# Altium PCB GFX_PCB.PcbDoc
Units mm, origin at the board's own origin, x right, y up, seen from the top; angles counter-clockwise.
Board outline 95.8 x 55.9 mm, 4 copper layers (Top Layer, GND, PWR, Bottom Layer), stack 1.526 mm thick; 52 components, 27 nets, 299 pads, 13 vias.
Unrouted connection lines stored in the file: 95.
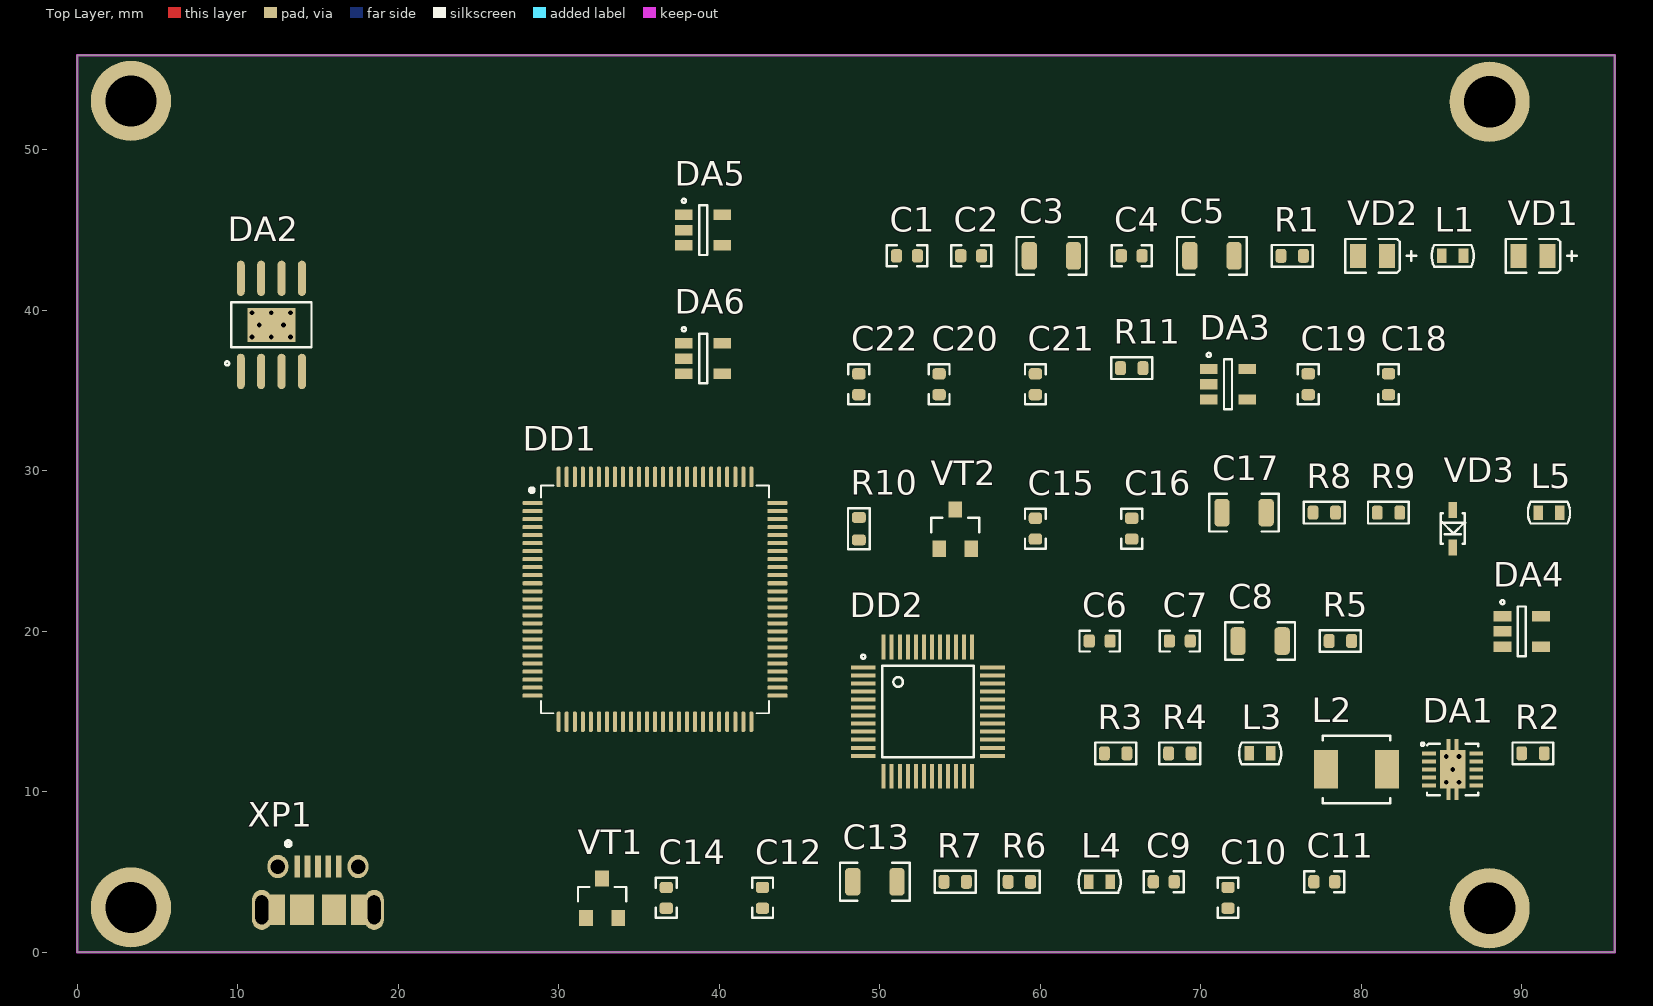
[diagram p0: Top Layer view]
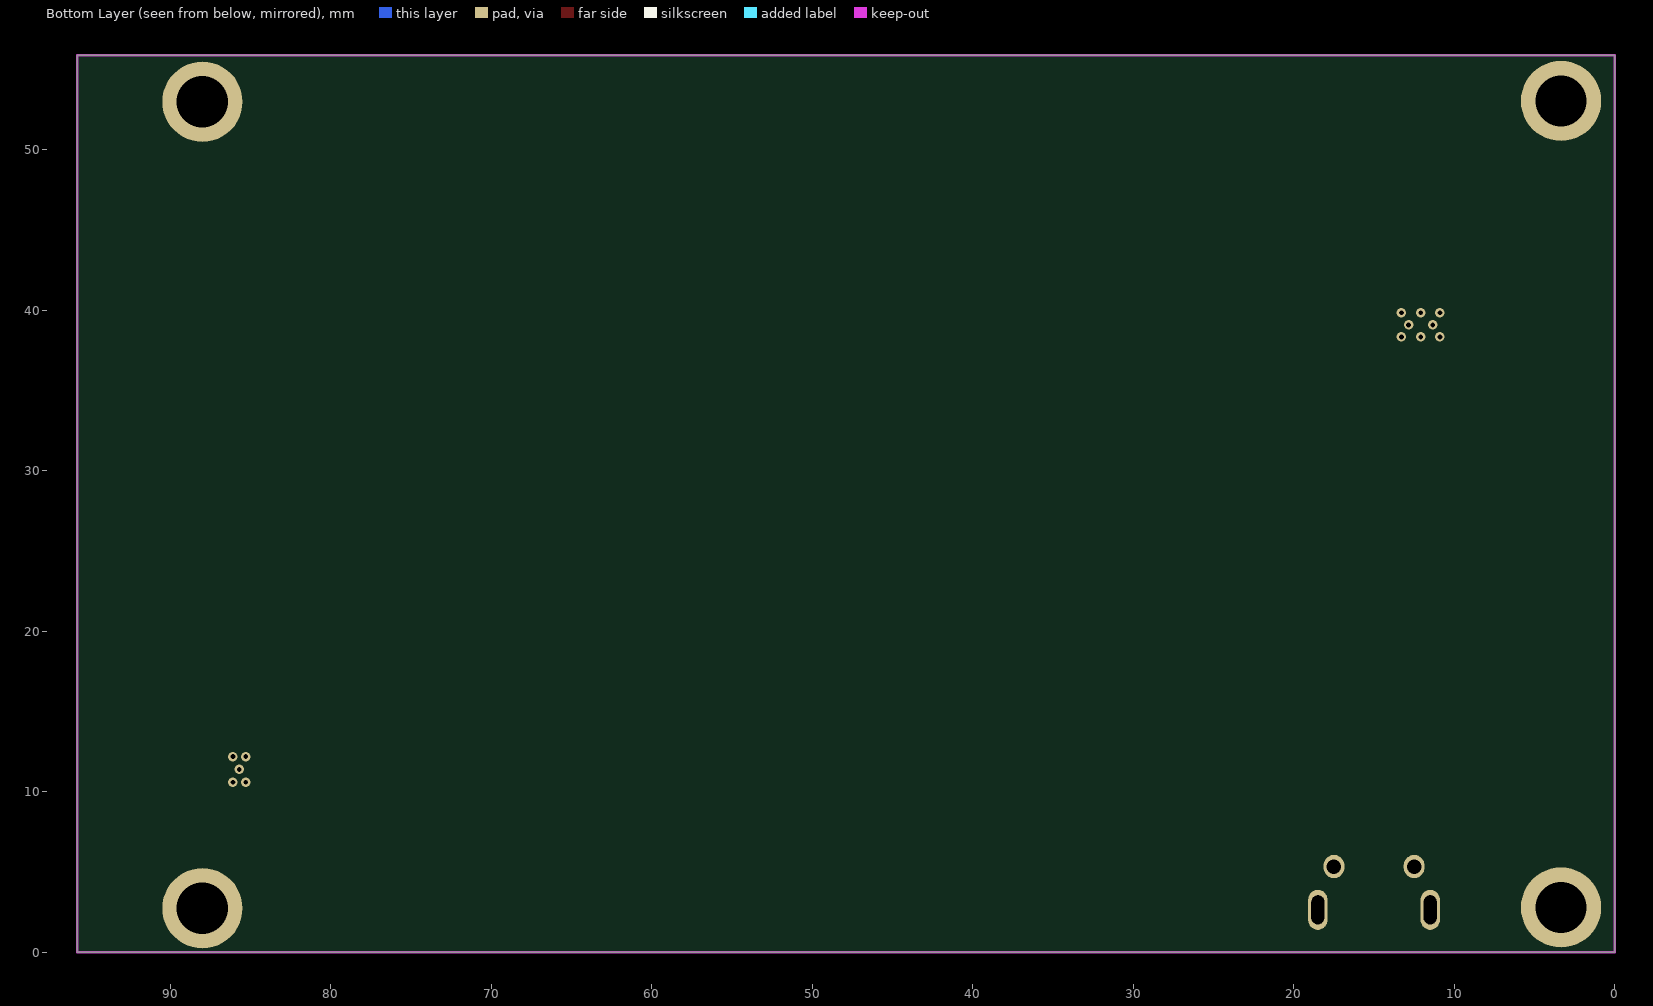
[diagram p1: Bottom Layer view, seen from below]

## Layer stack, top to bottom
Top Solder: solder mask 0.01, Solder Resist, Dk 3.5
Top Layer: signal copper 0.018
Dielectric1: core 0.127, 106+1080, Dk 4.2
GND: signal copper 0.018
Dielectric2: core 1.2, FR-4 18/18, Dk 4.2
PWR: signal copper 0.018
Dielectric3: prepreg 0.127, 106+1080, Dk 4.2
Bottom Layer: signal copper 0.018
Bottom Solder: solder mask 0.01, Solder Resist, Dk 3.5

## Board outline
0,0 0,55.9 95.8,55.9 95.8,0

## Design rules (kind name [scope] priority, off if disabled: settings)
Clearance Clearance_IL [All vs (OnLayer('GND') OR OnLayer('PWR'))] p1 off: gap=0.4
Clearance Clearance_poly [InPolygon] p2: gap=0.25
Clearance Clearance_poly_Diff_pairs [InPolygon vs InDifferentialPairClass('LVDS_100ohm')or InDifferentialPairClass('DIFF_90ohm')] p3: gap=0.25 except(0.15: Track-Track)
Clearance Clearance_KO [OnLayer('Keep-Out Layer')] p4: gap=0.5
Clearance Clearance_MSOP [(HasFootprint('MSOP 10 pitch 0.5mm body 3x3mm')) vs (HasFootprint('MSOP 10 pitch 0.5mm body 3x3mm'))] p5: gap=0.15
Clearance "Clearance_different different pair" [All] p6 off: gap=0.15 except(0.51: Track-Track)
Clearance [All] p7: gap=0.15
Clearance Clearance_1 [All] p8: gap=0.2 except(0.15: Track-Via)
ComponentClearance ComponentClearance_J [(HasFootprint('JMP 0603 2 pin')) vs (HasFootprint('JMP 0603 2 pin'))] p1: gap=0 collisioncheckmode=3 verticalgap=0 showdistances=FALSE
ComponentClearance ComponentClearance_Conn [HasFootprint('34690-0120','34690-0200','34690-0201') vs HasFootprint('34690-0120','34690-0200','34690-0201')] p2: gap=0 collisioncheckmode=3 verticalgap=0 showdistances=FALSE
ComponentClearance [All] p3: gap=0 collisioncheckmode=3 verticalgap=0 showdistances=TRUE
DiffPairsRouting DiffPair_Routing_DIFF_90 [InDifferentialPairClass('DIFF_90ohm')] p1: maxlimit=0.2 minlimit=0.2 mostfreqgap=0.2 toplayer_minwidth=0.2 toplayer_maxwidth=0.2 toplayer_prefwidth=0.2 midlayer1_minwidth=0.2 midlayer1_maxwidth=0.2 midlayer1_prefwidth=0.2 midlayer2_minwidth=0.2 midlayer2_maxwidth=0.2 midlayer2_prefwidth=0.2 bottomlayer_minwidth=0.2 bottomlayer_maxwidth=0.2 bottomlayer_prefwidth=0.2 maxuncoupledlength=12.7 // MIPI DCI CSI; PCIe; USB, HDMI...
DiffPairsRouting DiffPair_Routing_LVDS_100 [InDifferentialPairClass('LVDS_100ohm')] p2: maxlimit=0.23 minlimit=0.15 mostfreqgap=0.23 toplayer_mingap=0.23 toplayer_minwidth=0.17 toplayer_maxwidth=0.17 toplayer_prefwidth=0.17 midlayer1_maxgap=0.2 midlayer1_prefgap=0.2 midlayer1_minwidth=0.3 midlayer1_maxwidth=0.3 midlayer1_prefwidth=0.3 midlayer2_maxgap=0.2 midlayer2_prefgap=0.2 midlayer2_minwidth=0.3 midlayer2_maxwidth=0.3 midlayer2_prefwidth=0.3 bottomlayer_mingap=0.23 bottomlayer_minwidth=0.17 bottomlayer_maxwidth=0.17 bottomlayer_prefwidth=0.17 maxuncoupledlength=12.7
DiffPairsRouting DiffPair_Routing_CAN_120 [InDifferentialPairClass('CAN_120ohm')] p3: maxlimit=1.2 minlimit=0.25 mostfreqgap=1.2 toplayer_maxgap=1 toplayer_prefgap=1 toplayer_minwidth=0.15 toplayer_maxwidth=0.15 toplayer_prefwidth=0.15 midlayer1_mingap=1.2 midlayer1_minwidth=0.385 midlayer1_maxwidth=0.385 midlayer1_prefwidth=0.385 midlayer2_mingap=1.2 midlayer2_minwidth=0.385 midlayer2_maxwidth=0.385 midlayer2_prefwidth=0.385 bottomlayer_mingap=1 bottomlayer_maxgap=1 bottomlayer_prefgap=1 bottomlayer_minwidth=0.15 bottomlayer_maxwidth=0.15 bottomlayer_prefwidth=0.15 maxuncoupledlength=12.7
HoleSize [All] p1: absolutevalues=TRUE maxlimit=6 minlimit=0.3 maxpercent=80.000 minpercent=20.000
HoleToHoleClearance HoleToHoleClearance_MountHole [HasFootprint('HOLE4')] p1: gap=0.4 allowstackedmicrovias=TRUE
HoleToHoleClearance [All] p2: gap=0.45 allowstackedmicrovias=TRUE
MatchedLengths MatchedLengths_LVDS0 [InDifferentialPairClass('LVDS0')] p1: tolerance=1 checknetsindiffpair=FALSE checkdiffpairvsdiffpair=TRUE checkxsignals=TRUE checkothers=TRUE
MatchedLengths MatchedLengths_LVDS1 [InDifferentialPairClass('LVDS1')] p2: tolerance=1 checknetsindiffpair=FALSE checkdiffpairvsdiffpair=TRUE checkxsignals=TRUE checkothers=TRUE
MatchedLengths MatchedLengths_LVDS0_1 [InDifferentialPairClass('LVDS0')] p3: tolerance=0.5 checknetsindiffpair=TRUE checkdiffpairvsdiffpair=FALSE checkxsignals=FALSE checkothers=FALSE
MatchedLengths MatchedLengths_LVDS1_1 [InDifferentialPairClass('LVDS1')] p4: tolerance=0.5 checknetsindiffpair=TRUE checkdiffpairvsdiffpair=FALSE checkxsignals=FALSE checkothers=FALSE
MinimumSolderMaskSliver MinimumSolderMaskSliver_1 [HasFootprint('DF40HC(3.0)-100DS')] p1: minsoldermaskwidth=0.05
MinimumSolderMaskSliver [All] p2: minsoldermaskwidth=0.1
PlaneClearance [All] p1: clearance=0.5
PlaneConnect [All] p1: planeconnectstyle=Relief reliefexpansion=0.5 reliefentries=4 reliefconductorwidth=0.2 reliefairgap=0.25
PolygonConnect PolygonConnect_NoTherm [IsPad and (InComponentClass('no_thermo') or InPadClass('no_thermo'))] p1: connectstyle=Direct reliefconductorwidth=0.5 reliefentries=4 polygonreliefangle="90 Angle" airgapwidth=0.25
PolygonConnect PolygonConnect_Via [IsVia] p2: connectstyle=Direct reliefconductorwidth=0.254 reliefentries=4 polygonreliefangle="90 Angle" airgapwidth=0.254
PolygonConnect [All] p3: connectstyle=Relief reliefconductorwidth=0.5 reliefentries=4 polygonreliefangle="90 Angle" airgapwidth=0.25
RoutingCorners [All] p1: cornerstyle=45-Degree minsetback=2.5 maxsetback=2.5
RoutingVias [All] p1: holewidth=0.3 width=0.7 viastyle="Through Hole" minholewidth=0.3 minwidth=0.6 maxholewidth=1.4 maxwidth=2
SilkToSilkClearance [All] p1: silktosilkclearance=0
SilkToSolderMaskClearance [IsPad] p1: minsilkscreentomaskgap=0.15 clearancetoexposedcopper=TRUE
SolderMaskExpansion SolderMaskExpansion_Via [IsVia And HoleSize < 0.6] p1 off: expansion=-1
SolderMaskExpansion [All] p2: expansion=0.075
Width [All] p1: maxlimit=4 minlimit=0.15 preferedwidth=0.25 toplayer_prefwidth=0.2 midlayer1_minwidth=0.2 midlayer2_minwidth=0.2 bottomlayer_prefwidth=0.2 minimp=50.000000 maximp=50.000000 favimp=50.000000
20 further rules are at their usual default settings.

## Classes and differential pairs
differential pair class CAN_120ohm: MMS_CAN
differential pair class LVDS_100ohm: 0_1 01_1 1_1 11_1 CLK2_1 D4_1 D5_1 D6_1 D7_1 ETH_CTRX_1 FMD0_1 FMD0_C_1 FMD1_1 FMD1_C_1 HDMI_CLK HDMI_D0 HDMI_D1 HDMI_D2 INC0_1 INC1_1 LVDS0_CLK LVDS0_TX0 LVDS0_TX1 LVDS0_TX2 LVDS0_TX3 LVDS1_CLK LVDS1_TX0 LVDS1_TX1 LVDS1_TX2 LVDS1_TX3 RLD0_1 RLD0_C_1 RLD1_1 RLD1_C_1 RRD0_1 RRD0_C_1 RRD1_1 RRD1_C_1 SATA_C1RX_1 SATA_C1TX_1 SATA_CRX SATA_CTX
differential pair class DIFF_90ohm: CSI_CLK0 CSI_D0 CSI_D1 CSI_D2 CSI_D3 SATA_C1RX_1 SATA_C1TX_1 SATA_CRX SATA_CTX USB_DN1_1 USB_DN1_C_1 USB_DN2_1 USB_DN2_C_1 USB_DN3_1 USB_DN3_C_1 USB_DN4_1 USB_DN4_C_1 USB_OTG_D USB_OTG_DC_1

## Components (designator, comment, footprint, x,y, rotation, side; value= is the part's Value field where it differs from the comment)
C1 "0,1 мкФ 50 В" CAP0603 51.7,43.4 r0 top
C2 "4,7 мкФ 10 В" CAP0603 55.7,43.4 r0 top
C3 "47 мкф 6,3 В" CAP1206 60.7,43.4 r0 top
C4 "0,1 мкФ 50 В" CAP0603 65.7,43.4 r0 top
C5 "47 мкф 6,3 В" CAP1206 70.7,43.4 r0 top
C6 "0,1 мкФ 50 В" CAP0603 63.7,19.4 r0 top
C7 "0,1 мкФ 50 В" CAP0603 68.7,19.4 r0 top
C8 "47 мкф 6,3 В" CAP1206 73.7,19.4 r0 top
C9 "1 мкФ 50 В" CAP0603 67.7,4.4 r0 top
C10 "4,7 мкФ 10 В" CAP0603 71.7,3.4 r90 top
C11 "4,7 мкФ 10 В" CAP0603 77.7,4.4 r0 top
C12 "0,1 мкФ 50 В" CAP0603 42.7,3.4 r90 top
C13 "47 мкф 6,3 В" CAP1206 49.7,4.4 r0 top
C14 "1 мкФ 50 В" CAP0603 36.7,3.4 r90 top
C15 "0,1 мкФ 50 В" CAP0603 59.7,26.4 r90 top
C16 "1 мкФ 50 В" CAP0603 65.7,26.4 r90 top
C17 "47 мкф 6,3 В" CAP1206 72.7,27.4 r0 top
C18 "0,1 мкФ 50 В" CAP0603 81.7,35.4 r90 top
C19 "4,7 мкФ 10 В" CAP0603 76.7,35.4 r90 top
C20 "0,1 мкФ 50 В" CAP0603 53.7,35.4 r90 top
C21 "4,7 мкФ 10 В" CAP0603 59.7,35.4 r90 top
C22 "4,7 мкФ 10 В" CAP0603 48.7,35.4 r90 top
DA1 "TPS63000DRC" SON10 85.7,11.4 r0 top
DA2 "TP4056" SO8_PAD 12.095,39.1 r90 top
DA3 "TPS60403DBV" SOT23-5 71.7,35.4 r0 top
DA4 "MCP6001" SOT23-5 90,20 r0 top
DA5 "TL331IDBV" SOT23-5 39,45 r0 top
DA6 "TL331IDBV" SOT23-5 39,37 r0 top
DD1 "STM32F407VET6" QFP100P50_1600X1600X160L60X22N 36,22 r0 top
DD2 "AD9288BSTZ-40" TQFP48_L 53,15 r0 top
L1 "BLM18PG121SH1" L0603 85.7,43.4 r0 top
L2 "4,7 мкГн" SRP4020 79.7,11.4 r0 top
L3 "BLM18PG121SH1" L0603 73.7,12.4 r0 top
L4 "BLM18PG121SH1" L0603 63.7,4.4 r0 top
L5 "BLM18PG121SH1" L0603 91.7,27.4 r0 top
R1 "5,6 кОм ±5%" RES0603 75.7,43.4 r0 top
R2 "1 кОм ±5%" RES0603 90.7,12.4 r0 top
R3 "1 кОм ±5%" RES0603 64.7,12.4 r0 top
R4 "1 кОм ±5%" RES0603 68.7,12.4 r0 top
R5 "2 кОм ±5%" RES0603 78.7,19.4 r0 top
R6 "20 кОм ±5%" RES0603 58.7,4.4 r0 top
R7 "100 Ом ±5%" RES0603 54.7,4.4 r0 top
R8 "100 кОм ±5%" RES0603 77.7,27.4 r0 top
R9 "100 кОм ±5%" RES0603 81.7,27.4 r0 top
R10 "100 кОм ±5%" RES0603 48.7,26.4 r90 top
R11 "100 кОм ±5%" RES0603 65.7,36.4 r0 top
VD1 "GREEN" "LED-0805 GREEN" 90.7,43.4 r0 top
VD2 "RED" "LED-0805 RED" 80.7,43.4 r0 top
VD3 "1N4148WS" SOD323 85.7,26.4 r90 top
VT1 "IRLML6401" SOT23 32.7,3.4 r0 top
VT2 "2N7002" SOT23 54.7,26.4 r0 top
XP1 "105017-0001 Molex" USB_MICRO 15,4 r0 top

## Footprints (in the part's own frame and the unit in brackets; to place one, negate y for a bottom-side part, rotate by r counter-clockwise, add the part's x,y. Pads: shape width x height; smd on the part's side, far side on the other; paste and mask are expansions set on the pad)
CAP0603 [mm] "Chip Capacitor, Body 1.6x0.8mm, IPC High Density"
  rrect50% 0.7x0.83 smd paste-0.05 mask+0.075: 1(-0.65,0) 2(0.65,0)
  silkscreen extent -1.25,-0.65 1.25,0.65, body extent -0.8,-0.4 0.8,0.4, height 0.8
CAP1206 [mm] "Chip Capacitor, Body 3.2x1.6mm, IPC High Density"
  rrect50% 0.96x1.72 smd: 1(-1.375,0) 2(1.375,0)
  silkscreen extent -2.17,-1.17 2.17,1.17, body extent -1.6,-0.8 1.6,0.8, height 1
L0603 [mm]
  rect 0.6x0.9 smd paste-0.5: 1(-0.675,0) 2(0.675,0)
  silkscreen extent -1.31,-0.67 1.31,0.67, body extent -0.77,-0.4 0.83,0.4, height 0.95
"LED-0805 GREEN" [mm] "Чип светодиод 0805/ KPT-2012SURC/ KPT-2012SGC/ KPT-2012SYC"
  rect 1x1.5 smd: A(0.9,0) C(-0.9,0)
  silkscreen extent -1.7,-1.05 2.73,1.05, body extent -1,-0.62 1,0.63, height 0.7
"LED-0805 RED" [mm] "Чип светодиод 0805/ KPT-2012SURC/ KPT-2012SGC/ KPT-2012SYC"
  rect 1x1.5 smd: A(0.9,0) C(-0.9,0)
  silkscreen extent -1.7,-1.05 2.73,1.05, body extent -1,-0.62 1,0.63, height 0.7
QFP100P50_1600X1600X160L60X22N [mm] "Quad Flat Pack (QFP), 0.50 mm pitch; square, 25 pin X 25 pin, 14.00 mm L X 14.00 mm W X 1.60 mm H body"
  rrect53% 1.26x0.25 smd mask+0.075: 1(-7.63,6) 2(-7.63,5.5) 3(-7.63,5) 4(-7.63,4.5) 5(-7.63,4) 6(-7.63,3.5) 7(-7.63,3) 8(-7.63,2.5) 9(-7.63,2) 10(-7.63,1.5) 11(-7.63,1) 12(-7.63,0.5) 13(-7.63,0) 14(-7.63,-0.5) 15(-7.63,-1) 16(-7.63,-1.5) 17(-7.63,-2) 18(-7.63,-2.5) 19(-7.63,-3) 20(-7.63,-3.5) 21(-7.63,-4) 22(-7.63,-4.5) 23(-7.63,-5) 24(-7.63,-5.5) 25(-7.63,-6) 51(7.63,-6) 52(7.63,-5.5) 53(7.63,-5) 54(7.63,-4.5) 55(7.63,-4) 56(7.63,-3.5) 57(7.63,-3) 58(7.63,-2.5) 59(7.63,-2) 60(7.63,-1.5) 61(7.63,-1) 62(7.63,-0.5) 63(7.63,0) 64(7.63,0.5) 65(7.63,1) 66(7.63,1.5) 67(7.63,2) 68(7.63,2.5) 69(7.63,3) 70(7.63,3.5) 71(7.63,4) 72(7.63,4.5) 73(7.63,5) 74(7.63,5.5) 75(7.63,6)
  rrect53% 0.25x1.26 smd mask+0.075: 26(-6,-7.63) 27(-5.5,-7.63) 28(-5,-7.63) 29(-4.5,-7.63) 30(-4,-7.63) 31(-3.5,-7.63) 32(-3,-7.63) 33(-2.5,-7.63) 34(-2,-7.63) 35(-1.5,-7.63) 36(-1,-7.63) 37(-0.5,-7.63) 38(0,-7.63) 39(0.5,-7.63) 40(1,-7.63) 41(1.5,-7.63) 42(2,-7.63) 43(2.5,-7.63) 44(3,-7.63) 45(3.5,-7.63) 46(4,-7.63) 47(4.5,-7.63) 48(5,-7.63) 49(5.5,-7.63) 50(6,-7.63) 76(6,7.63) 77(5.5,7.63) 78(5,7.63) 79(4.5,7.63) 80(4,7.63) 81(3.5,7.63) 82(3,7.63) 83(2.5,7.63) 84(2,7.63) 85(1.5,7.63) 86(1,7.63) 87(0.5,7.63) 88(0,7.63) 89(-0.5,7.63) 90(-1,7.63) 91(-1.5,7.63) 92(-2,7.63) 93(-2.5,7.63) 94(-3,7.63) 95(-3.5,7.63) 96(-4,7.63) 97(-4.5,7.63) 98(-5,7.63) 99(-5.5,7.63) 100(-6,7.63)
  silkscreen extent -7.84,-7.1 7.1,7.1, body extent -8,-8 8,8, height 1.6
RES0603 [mm] "Chip Resistor, Body 1.6x0.8mm, IPC High Density"
  rrect50% 0.67x0.87 smd paste-0.05 mask+0.075: 1(-0.7,0) 2(0.7,0)
  silkscreen extent -1.28,-0.67 1.28,0.67, body extent -0.8,-0.4 0.8,0.4, height 0.45
SO8_PAD [mm] "8-Pin Small Outline Integrated Circuit 1.27 mm Pitch, IPC Medium Density"
  oval 2.2x0.5 smd: 1(-2.9,1.905) 2(-2.9,0.635) 3(-2.9,-0.635) 4(-2.9,-1.905) 5(2.9,-1.905) 6(2.9,-0.635) 7(2.9,0.635) 8(2.9,1.905)
  rect 2.13x3 smd: 9(0,0)
  silkscreen extent -2.52,-2.5 1.4,2.88, body extent -3.01,-2.5 3.01,2.5, height 1.75
SOD323 [mm] "SOD-323/SC-76; 2 Leads; Body 1.7 x 1.3 mm, (LxW)"
  rect 1x0.55 smd: A(1.175,0) C(-1.175,0)
  silkscreen extent -0.95,-0.77 0.95,0.75, body extent -1.25,-0.6 1.45,0.65, height 1.1
SON10 [mm] "SON, 10-Leads, Body 3,00x3,00mm, Pitch 0,50mm, Thermal Pad 2,40x1,65mm, IPC Medium Density"
  rect 0.85x0.25 smd paste-0.5 mask+0.075: 1(-1.475,1) 2(-1.475,0.5) 3(-1.475,0) 4(-1.475,-0.5) 5(-1.475,-1) 6(1.475,-1) 7(1.475,-0.5) 8(1.475,0) 9(1.475,0.5) 10(1.475,1)
  rect 0.25x0.8 smd paste-0.5 mask+0.075: 11(-0.25,-1.5) 11(-0.25,1.5) 11(0.25,-1.5) 11(0.25,1.5)
  rect 1.6x2.4 smd paste-1 mask+0.075: 11(0,0)
  silkscreen extent -1.97,-1.6 1.6,1.67, body extent -1.5,-1.5 1.5,1.5, height 0.89
SOT23 [mm] "SOT-23; 3 Leads; Body 3.0 x 2.5 mm, inc. leads (LxW max)"
  rect 0.85x1 smd: 1(-1,-1.25) 2(1,-1.25) 3(0,1.2)
  silkscreen extent -1.5,-0.23 1.5,0.67, body extent -1.46,-1.3 1.46,1.18, height 1
SOT23-5 [mm] "SOT23, 5-Leads, Body 2.9x1.6mm, Pitch 0.95mm, Lead Span 2.7mm, IPC Medium Density"
  rect 1.1x0.65 smd: 1(-1.2,0.95) 2(-1.2,0) 3(-1.2,-0.95) 4(1.2,-0.95) 5(1.2,0.95)
  silkscreen extent -1.32,-1.55 0.25,1.95, body extent -1.5,-1.5 1.5,1.5, height 1.45
SRP4020 [mm] "SMT power inductors, SRP4020 series, BOURNS"
  rect 1.5x2.4 smd: 1(-1.9,0) 2(1.9,0)
  silkscreen extent -2.1,-2.1 2.1,2.1, body extent -2.15,-2 2.15,2, height 1.94
TQFP48_L [mm]
  rect 1.55x0.25 smd mask+0.075: 1(-4.025,2.75) 2(-4.025,2.25) 3(-4.025,1.75) 4(-4.025,1.25) 5(-4.025,0.75) 6(-4.025,0.25) 7(-4.025,-0.25) 8(-4.025,-0.75) 9(-4.025,-1.25) 10(-4.025,-1.75) 11(-4.025,-2.25) 12(-4.025,-2.75) 25(4.025,-2.75) 26(4.025,-2.25) 27(4.025,-1.75) 28(4.025,-1.25) 29(4.025,-0.75) 30(4.025,-0.25) 31(4.025,0.25) 32(4.025,0.75) 33(4.025,1.25) 34(4.025,1.75) 35(4.025,2.25) 36(4.025,2.75)
  rect 0.25x1.55 smd mask+0.075: 13(-2.75,-4.025) 14(-2.25,-4.025) 15(-1.75,-4.025) 16(-1.25,-4.025) 17(-0.75,-4.025) 18(-0.25,-4.025) 19(0.25,-4.025) 20(0.75,-4.025) 21(1.25,-4.025) 22(1.75,-4.025) 23(2.25,-4.025) 24(2.75,-4.025) 37(2.75,4.025) 38(2.25,4.025) 39(1.75,4.025) 40(1.25,4.025) 41(0.75,4.025) 42(0.25,4.025) 43(-0.25,4.025) 44(-0.75,4.025) 45(-1.25,4.025) 46(-1.75,4.025) 47(-2.25,4.025) 48(-2.75,4.025)
  silkscreen extent -4.15,-2.85 2.85,3.55, body extent -4.5,-4.5 4.5,4.5, height 1.45
USB_MICRO [mm] "MICRO USB B Connector; Molex 105017-0001"
  rect 0.35x1.35 smd mask+0.075: 1(-1.3,1.35) 2(-0.65,1.35) 3(0,1.35) 4(0.65,1.35) 5(1.3,1.35)
  oval 1.2x2.5 hole 0.8 slot 1.8 at 90.4 deg: SH(-3.5,-1.35) SH(3.5,-1.35)
  rrect55% 1.8x1.9 smd: SH(-3.2,-1.35) SH(3.2,-1.35)
  rect 1.5x1.9 smd: SH(-2.8,-1.35) SH(-1,-1.35) SH(1,-1.35) SH(2.8,-1.35)
  oval 1.3x1.45 hole 0.9: SH(-2.5,1.35) SH(2.5,1.35)
  silkscreen extent -2,2.62 -1.7,2.93, body extent -4.1,-3.96 4.1,1.47, height 2.66

## Part data
C1 C4 C6 C7 C12 C15 C18 C20: library part "С0603-0,1 мкФ-50 В-X7R-±10%-Yageo", "Конденсатор SMD 0603"
C2 C10 C11 C19 C21 C22: library part "С0603-4,7 мкФ-10 В-X5R-±10%-Yageo", "Конденсатор SMD 0603"
C3 C5 C8 C13 C17: library part "С1206-47 мкф-6,3 В-X5R-±20%-Murata", "Конденсатор керамический"
C9 C14 C16: library part "С0603-1 мкФ-50 В-X7R-±10%-Yageo", "Конденсатор SMD 0603"
DA1: library part "TPS63000DRC SON10  Texas", "Микросхема"
DA2: library part "TP4056 SO8 NanJing", "Микросхема"
DA3: library part "TPS60403DBV SOT23-5 Texas", "Микросхема"
DA4: library part "MCP6001RT-E/OT SOT23-5 Microchip", "Микросхема"
DA5 DA6: library part "TL331IDBV SOT23-5 Texas Instruments", "Микросхема"
DD1: library part "STM32F407VET6 TQFP100 STM", "Микросхема"
DD2: library part "AD9288BSTZ-40 LQFP48 Analog Devices", "Микросхема"
L1 L3 L4 L5: library part BLM18PG121SH1-Murata, "Фильтр ЭМП"
L2: library part "SRP4020TA-4R7M Bourns", "Дроссель"
R1: library part "RC0603-5,6 кОм-5%-Yageo", "Резистор SMD 0603"
R2 R3 R4: library part "RC0603-1 кОм-5%-Yageo", "Резистор SMD 0603"
R5: library part "RC0603-2 кОм-5%-Yageo", "Резистор SMD 0603"
R6: library part "RC0603-20 кОм-5%-Yageo", "Резистор SMD 0603"
R7: library part "RC0603-100 Ом-5%-Yageo", "Резистор SMD 0603"
R8 R9 R10 R11: library part "RC0603-100 кОм-5%-Yageo", "Резистор SMD 0603"
VD1: library part "KPT-2012SGC GREEN", "Светодиод"
VD2: library part "KPT-2012SURC RED", "Светодиод"
VD3: library part "1N4148WS SOD-323 Diodes", "Диод"
VT1: library part "IRLML6401 SOT23 Infineon", "Транзистор"
VT2: library part "2N7002 SOT23", "Транзистор"
XP1: library part "CON_5_MICROUSB_105017-0001 Molex", "Разъем"

## Free pads (board coordinates)
  round 5 hole 3.2: 1(3.35,2.8) 1(3.35,53.05) 1(88,2.75) 1(88,53)

## Via types
v1: diameter 0.6, hole 0.3, Top Layer to Bottom Layer, 13 vias

## Nets (pads, with @x,y where several pads share a name; then routed paths per layer and width w, separated by ;. In a path a pad name is that pad's centre, name@x,y a point inside that pad or via, vN(x,y) a via of type N, cw(c..) or ccw(c..) an arc to the next point about the centre after c; other vN are vias at no path point)
-3V: C15.1 C16.1 C17.1 L5.2
BAT_INFO: C18.1 R9.1 R10.2
GND: C1.2 C2.2 C3.2 C4.2 C5.2 C6.1 C7.2 C8.2 C9.2 C10.2 C11.2 C12.2 C13.2 C14.2 C15.2 C16.2 C17.2 C18.2 C19.2 C20.2 C21.2 DA1.3 DA1.9 DA1.11 DA2.1 DA2.3 DA3.4 R2.1 R5.1 R6.1 R10.1 R11.1 VT2.2 XP1.5 XP1.SH
  other v1: 85.3,10.6 86.1,10.6 85.7,11.4 85.3,12.2 86.1,12.2
NetC1_1: C1.1 C2.1 C3.1 C20.1 C21.1 DA1.1 DA3.2 L1.1 L3.1 L4.1 R1.2
NetC6_2: C6.2 DA1.7 DA1.8 R7.2
NetC9_1: C9.1 C10.1 C11.1 DA1.5 DA2.5 R7.1 R8.1 VT1.3
NetC14_1: C14.1 DA2.4 DA2.8 VD1.A VD2.A XP1.1
NetC19_1: C19.1 DA3.1 L5.1
NetC22_1: C22.1 DA3.3
NetC22_2: C22.2 DA3.5
NetDA1_2: DA1.2 L2.2
NetDA1_4: DA1.4 L2.1
NetDA1_6: DA1.6 R6.2 R9.2 VT1.2
NetDA1_10: DA1.10 R1.1 R2.2
NetDA2_2: DA2.2 R5.2
NetDA2_6: DA2.6 R4.1
NetDA2_7: DA2.7 R3.1
NetR3_2: R3.2 VD2.C
NetR4_2: R4.2 VD1.C
NetR8_2: R8.2 VD3.A VT1.1 VT2.3
OK: VD3.C
USB_DM: XP1.2
USB_DP: XP1.3
VDA: C12.1 C13.1 L4.2
VDA0: C7.1 C8.1 L3.2
VDD: C4.1 C5.1 L1.2
VDD_ON: R11.2 VT2.1
pads on no net: DA2.9 DA4.1 DA4.2 DA4.3 DA4.4 DA4.5 DA5.1 DA5.2 DA5.3 DA5.4 DA5.5 DA6.1 DA6.2 DA6.3 DA6.4 DA6.5 DD1.1 DD1.2 DD1.3 DD1.4 DD1.5 DD1.6 DD1.7 DD1.8 DD1.9 DD1.10 DD1.11 DD1.12 DD1.13 DD1.14 DD1.15 DD1.16 DD1.17 DD1.18 DD1.19 DD1.20 DD1.21 DD1.22 DD1.23 DD1.24 DD1.25 DD1.26 DD1.27 DD1.28 DD1.29 DD1.30 DD1.31 DD1.32 DD1.33 DD1.34 DD1.35 DD1.36 DD1.37 DD1.38 DD1.39 DD1.40 DD1.41 DD1.42 DD1.43 DD1.44 DD1.45 DD1.46 DD1.47 DD1.48 DD1.49 DD1.50 DD1.51 DD1.52 DD1.53 DD1.54 DD1.55 DD1.56 DD1.57 DD1.58 DD1.59 DD1.60 DD1.61 DD1.62 DD1.63 DD1.64 DD1.65 DD1.66 DD1.67 DD1.68 DD1.69 DD1.70 DD1.71 DD1.72 DD1.73 DD1.74 DD1.75 DD1.76 DD1.77 DD1.78 DD1.79 DD1.80 DD1.81 DD1.82 DD1.83 DD1.84 DD1.85 DD1.86 DD1.87 DD1.88 DD1.89 DD1.90 DD1.91 DD1.92 DD1.93 DD1.94 DD1.95 DD1.96 DD1.97 DD1.98 DD1.99 DD1.100 DD2.1 DD2.2 DD2.3 DD2.4 DD2.5 DD2.6 DD2.7 DD2.8 DD2.9 DD2.10 DD2.11 DD2.12 DD2.13 DD2.14 DD2.15 DD2.16 DD2.17 DD2.18 DD2.19 DD2.20 DD2.21 DD2.22 DD2.23 DD2.24 DD2.25 DD2.26 DD2.27 DD2.28 DD2.29 DD2.30 DD2.31 DD2.32 DD2.33 DD2.34 DD2.35 DD2.36 DD2.37 DD2.38 DD2.39 DD2.40 DD2.41 DD2.42 DD2.43 DD2.44 DD2.45 DD2.46 DD2.47 DD2.48 XP1.4
copper on no net:
  other v1: 10.895,38.35 12.095,38.35 13.295,38.35 11.345,39.1 12.845,39.1 10.895,39.85 12.095,39.85 13.295,39.85

## Keep-outs
Keep-Out Layer:
  the board outline again, w0.15

## Dimensions
0,55.9 to 95.8,55.9 on Dimensions 11
0,0 to 0,55.9 on Dimensions 11